# Altium PCB MSP430贴片转直插板.PcbDoc
Units mm, origin at the board's own origin, x right, y up, seen from the top; angles counter-clockwise.
Board outline 152.4 x 101.6 mm, 2 copper layers (Top Layer, Bottom Layer); 5 components, 64 nets, 132 pads, 0 vias.
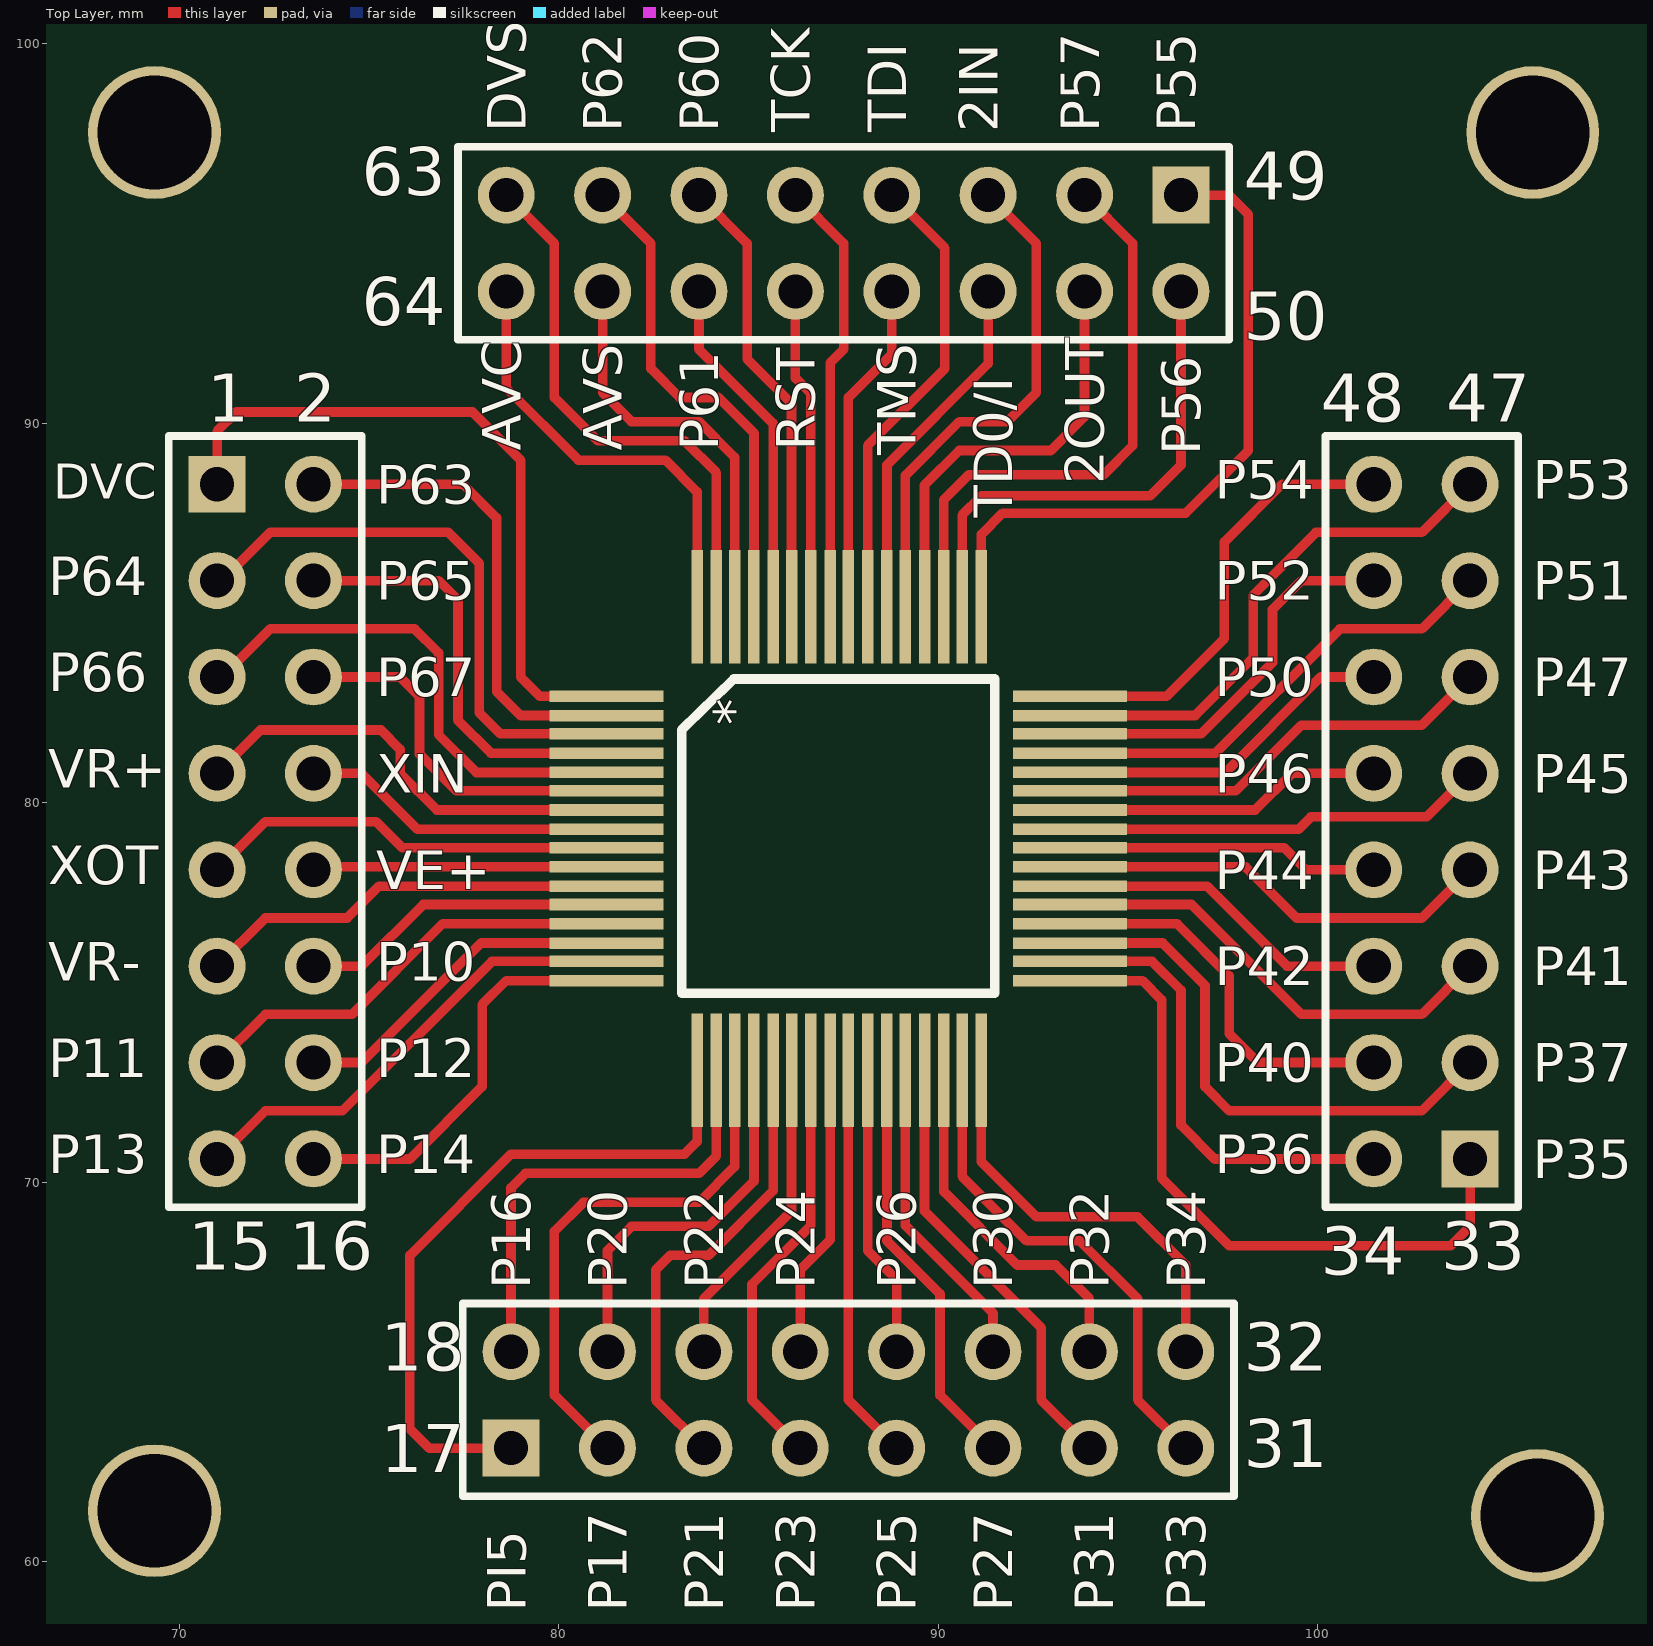
[diagram p0: Top Layer view]
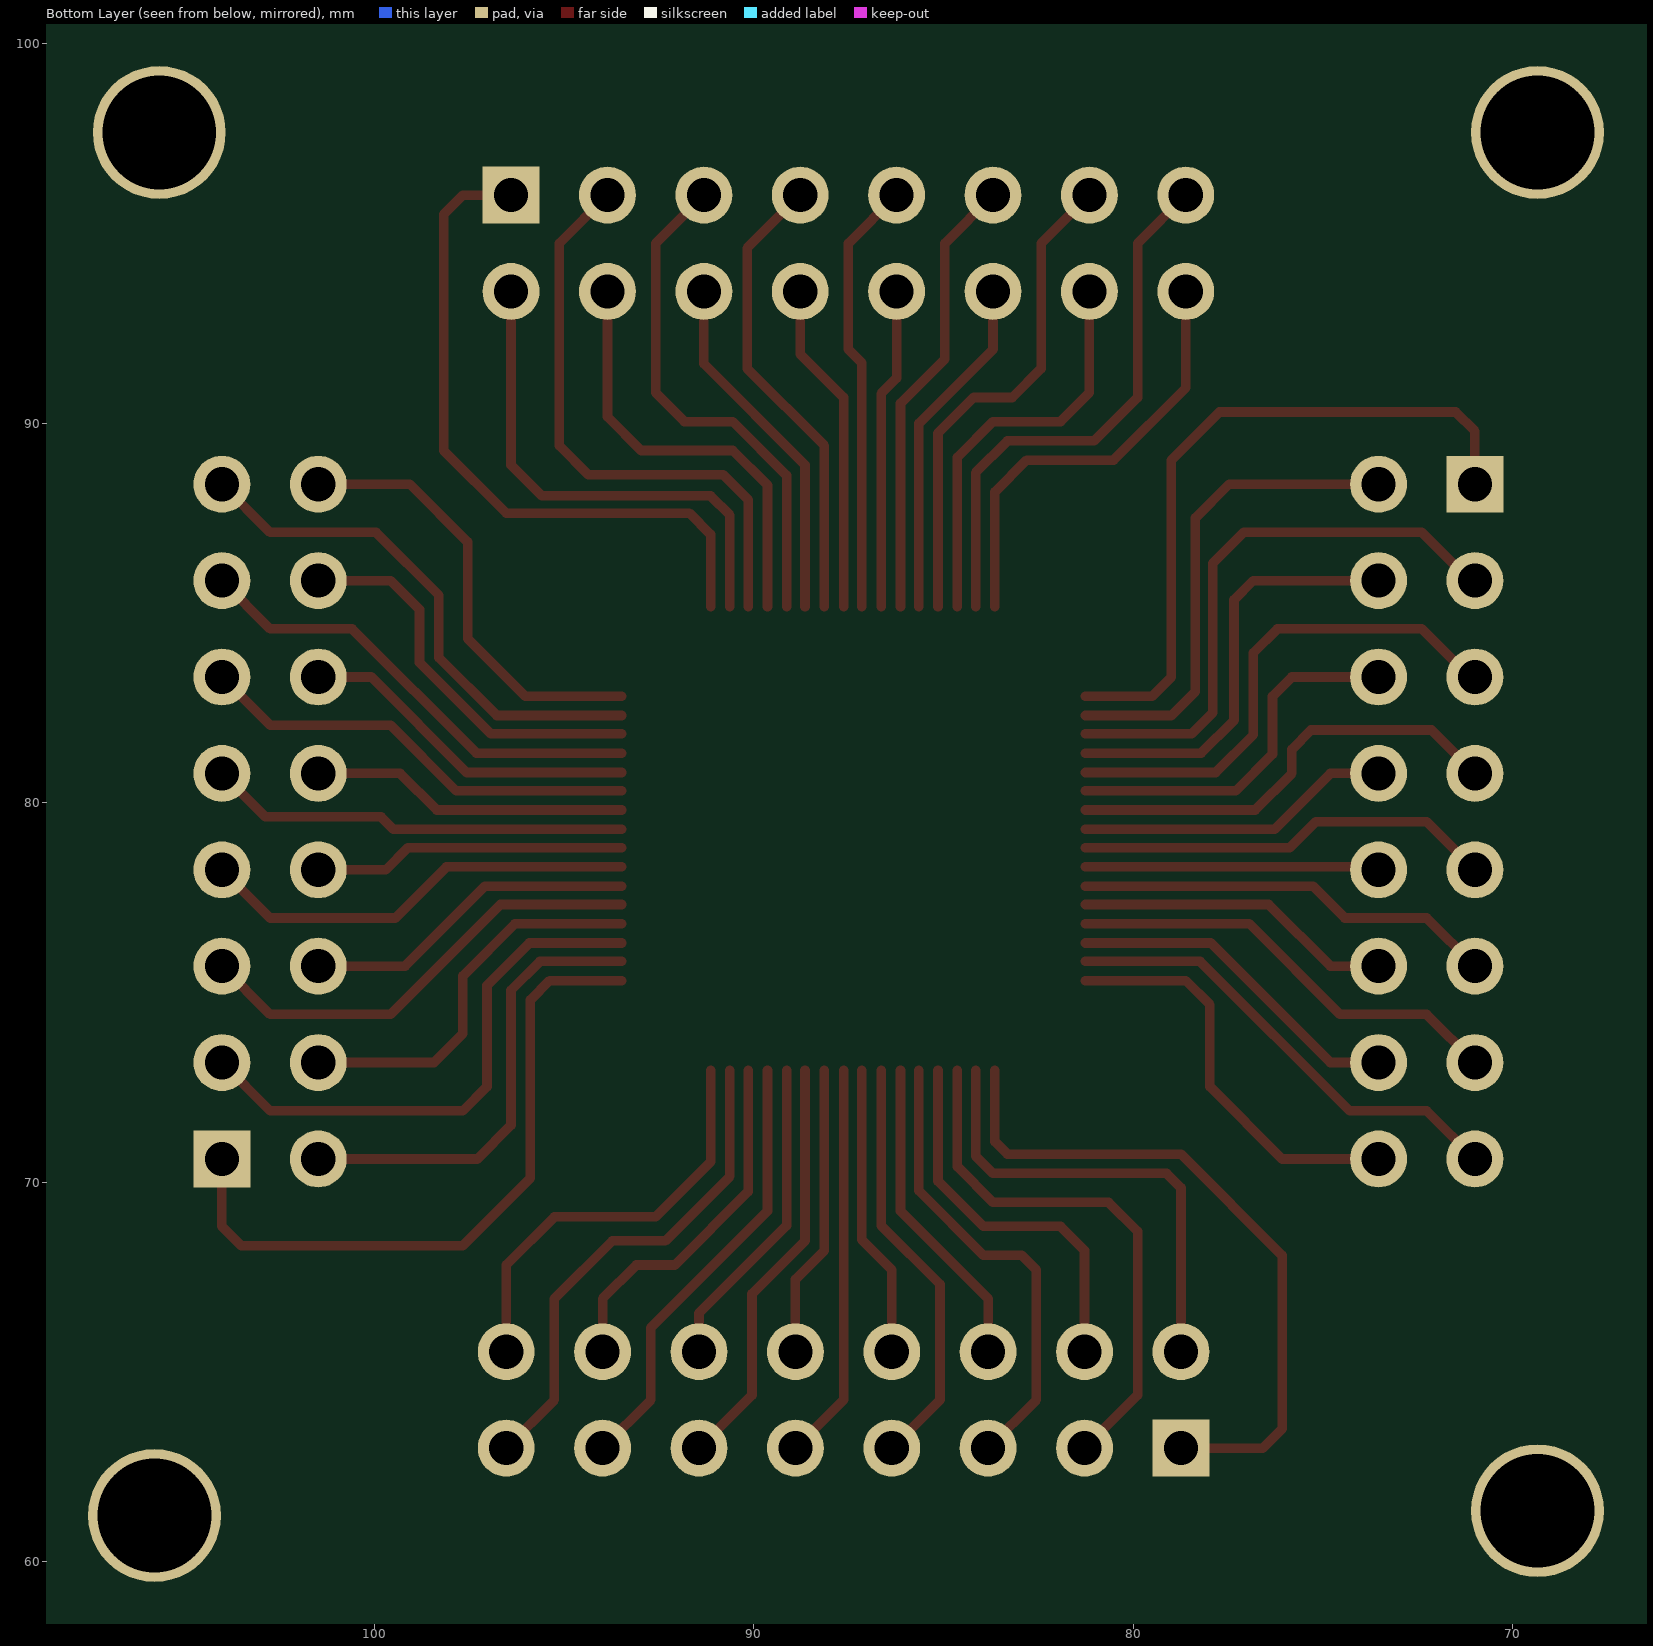
[diagram p1: Bottom Layer view, seen from below]

## Layer stack, top to bottom
Top Layer: signal copper 0.0356
Dielectric: dielectric 0.32, FR-4, Dk 4.8
Bottom Layer: signal copper 0.0356

## Board outline
25.4,25.4 177.8,25.4 177.8,127 25.4,127

## Design rules (kind name [scope] priority, off if disabled: settings)
Clearance [All] p1: gap=0.2
ComponentClearance [All] p1: gap=0.254 collisioncheckmode=3 verticalgap=0.254
PolygonConnect [All] p1: connectstyle=Relief reliefconductorwidth=0.254 reliefentries=4 polygonreliefangle="90 Angle"
RoutingVias [All] p1: holewidth=0.711 width=1.27 viastyle="Through Hole" minholewidth=0.711 minwidth=1.27 maxholewidth=0.711 maxwidth=1.27
SolderMaskExpansion [All] p1: expansion=0.102
TestPointUsage [All] p1: valid=0 allowmultiple=FALSE
Testpoint [All] p1: side=7 testpointundercomponent=TRUE minsize=1.016 maxsize=2.54 preferedsize=1.524 minholesize=0 maxholesize=1.016 preferedholesize=0.813 testpointgrid=0.025 style=1021 order=0123456789
Width [All] p1: maxlimit=0.254 minlimit=0.254 preferedwidth=0.254
17 further rules are at their usual default settings.

## Components (designator, comment, footprint, x,y, rotation, side; value= is the part's Value field where it differs from the comment)
P1 "Header 8X2" HDR2X8 70.993,88.392 r270 top
P2 "Header 8X2" HDR2X8 78.74,62.992 r0 top
P3 "Header 8X2" HDR2X8 104.013,70.612 r90 top
P4 "Header 8X2" HDR2X8 96.393,96.012 r180 top
? "MSP430F149" MSP41X 81.28,82.804 r270 top

## Footprints (in the part's own frame and the unit in brackets; to place one, negate y for a bottom-side part, rotate by r counter-clockwise, add the part's x,y. Pads: shape width x height; smd on the part's side, far side on the other; paste and mask are expansions set on the pad)
HDR2X8 [mm] "Connector; Header; 8x2 Position"
  rect 1.5x1.5 hole 0.9: 1(0,0)
  round 1.5 hole 0.9: 2(0,2.54) 3(2.54,0) 4(2.54,2.54) 5(5.08,0) 6(5.08,2.54) 7(7.62,0) 8(7.62,2.54) 9(10.16,0) 10(10.16,2.54) 11(12.7,0) 12(12.7,2.54) 13(15.24,0) 14(15.24,2.54) 15(17.78,0) 16(17.78,2.54)
  silkscreen extent -1.27,-1.27 19.05,3.81
MSP41X [mil]
  rect 12x118 smd: 1(0,-1) 2(20,-1) 3(39,-1) 4(59,-1) 5(79,-1) 6(98,-1) 7(118,-1) 8(138,-1) 9(157,-1) 10(177,-1) 11(197,-1) 12(216,-1) 13(236,-1) 14(256,-1) 15(275,-1) 16(295,-1) 33(295,480) 34(275,480) 35(256,480) 36(236,480) 37(216,480) 38(197,480) 39(177,480) 40(157,480) 41(138,480) 42(118,480) 43(98,480) 44(79,480) 45(59,480) 46(39,480) 47(20,480) 48(0,480)
  rect 118x12 smd: 17(388,93) 18(388,113) 19(388,132) 20(388,152) 21(388,172) 22(388,191) 23(388,211) 24(388,231) 25(388,250) 26(388,270) 27(388,290) 28(388,309) 29(388,329) 30(388,349) 31(388,368) 32(388,388) 49(-93,388) 50(-93,368) 51(-93,349) 52(-93,329) 53(-93,309) 54(-93,290) 55(-93,270) 56(-93,250) 57(-93,231) 58(-93,211) 59(-93,191) 60(-93,172) 61(-93,152) 62(-93,132) 63(-93,113) 64(-93,93)
  silkscreen extent -18,77 308,402

## Part data
P1 P2 P3 P4: "Header, 8-Pin, Dual row"
?: library part MSP430F133

## Free pads (board coordinates)
  round 3.5 hole 3: 0(69.342,97.663) 1(105.664,97.663) 2(105.791,61.214) 3(69.342,61.341)

## Nets (pads, with @x,y where several pads share a name; then routed paths per layer and width w, separated by ;. In a path a pad name is that pad's centre, name@x,y a point inside that pad or via, vN(x,y) a via of type N, cw(c..) or ccw(c..) an arc to the next point about the centre after c; other vN are vias at no path point)
AVCC: ?.64 P4.16 | length 11.7
  Top Layer w0.254: P4.16 78.613,90.932 80.518,89.027 82.804,89.027 83.642,88.189 ?.64
AVSS: ?.62 P4.14 | length 10.8
  Top Layer w0.254: P4.14 81.153,90.805 81.915,90.043 83.693,90.043 84.633,89.103 ?.62
DVCC: ?.1 P1.1 | length 18.3
  Top Layer w0.254: P1.1 70.993,89.789 71.501,90.297 77.724,90.297 78.994,89.027 78.994,83.312 79.502,82.804 ?.1
DVSS: ?.63 P4.15 | length 14.5
  Top Layer w0.254: P4.15 79.883,94.742 79.883,90.678 81.026,89.535 83.312,89.535 84.15,88.697 ?.63
P10: ?.12 P1.12 | length 8.4
  Top Layer w0.254: P1.12 74.803,75.692 76.429,77.318 ?.12
P11: ?.13 P1.13 | length 11.8
  Top Layer w0.254: P1.13 72.263,74.422 74.549,74.422 76.937,76.81 ?.13
P12: ?.14 P1.14 | length 9
  Top Layer w0.254: P1.14 74.803,73.152 77.953,76.302 ?.14
P13: ?.15 P1.15 | length 12.4
  Top Layer w0.254: P1.15 72.263,71.882 74.295,71.882 78.232,75.819 ?.15
P14: ?.16 P1.16 | length 10.9
  Top Layer w0.254: P1.16 76.073,70.612 77.978,72.517 77.978,74.676 78.613,75.311 ?.16
P16: ?.18 P2.2 | length 12.3
  Top Layer w0.254: P2.2 78.74,69.85 79.121,70.231 83.693,70.231 84.15,70.688 ?.18
P17: ?.19 P2.3 | length 14.3
  Top Layer w0.254: P2.3 79.883,64.389 79.883,68.707 80.645,69.469 83.693,69.469 84.633,70.409 ?.19
P18: ?.20 P2.4 | length 10.2
  Top Layer w0.254: P2.4 81.28,68.199 81.915,68.834 83.947,68.834 85.141,70.028 ?.20
P21: ?.21 P2.5 | length 12.4
  Top Layer w0.254: P2.5 82.55,64.262 82.55,67.691 82.931,68.072 83.947,68.072 85.649,69.774 ?.21
P22: ?.22 P2.6 | length 8.4
  Top Layer w0.254: P2.6 83.82,66.929 86.131,69.24 ?.22
P23: ?.23 P2.7 | length 11.1
  Top Layer w0.254: P2.7 85.09,64.262 85.09,67.31 86.639,68.859 ?.23
P24: ?.24 P2.8 | length 7.7
  Top Layer w0.254: P2.8 86.36,67.691 87.147,68.478 ?.24
P25: ?.25 P2.9 | length 10.5
  Top Layer w0.254: ?.25 87.63,64.262 P2.9
P26: ?.26 P2.10 | length 7.7
  Top Layer w0.254: ?.26 88.138,68.199 88.9,67.437 P2.10
P27: ?.27 P2.11 | length 11.1
  Top Layer w0.254: ?.27 88.646,68.453 90.043,67.056 90.043,64.389 P2.11
P30: ?.28 P2.12 | length 8.4
  Top Layer w0.254: ?.28 89.129,68.859 91.44,66.548 P2.12
P31: ?.29 P2.13 | length 11.8
  Top Layer w0.254: ?.29 89.637,69.24 92.71,66.167 92.71,64.262 P2.13
P32: ?.30 P2.14 | length 9.6
  Top Layer w0.254: ?.30 90.145,69.748 92.075,67.818 93.091,67.818 93.98,66.929 P2.14
P33: ?.31 P2.15 | length 13.2
  Top Layer w0.254: ?.31 90.627,70.155 92.329,68.453 93.726,68.453 95.25,66.929 95.25,64.262 P2.15
P34: ?.32 P2.16 | length 11.2
  Top Layer w0.254: ?.32 91.135,70.536 92.583,69.088 95.25,69.088 96.52,67.818 P2.16
P35: ?.33 P3.1 | length 18.2
  Top Layer w0.254: ?.33 95.377,75.311 95.885,74.803 95.885,70.104 97.663,68.326 103.505,68.326 104.013,68.834 P3.1
P36: ?.34 P3.2 | length 12.2
  Top Layer w0.254: ?.34 95.631,75.819 96.393,75.057 96.393,71.501 97.282,70.612 P3.2
P37: ?.35 P3.3 | length 14.5
  Top Layer w0.254: ?.35 95.91,76.302 97.028,75.184 97.028,72.517 97.663,71.882 102.743,71.882 P3.3
P40: ?.36 P3.4 | length 10.4
  Top Layer w0.254: ?.36 96.291,76.81 97.663,75.438 97.663,73.914 98.425,73.152 P3.4
P41: ?.37 P3.5 | length 12.3
  Top Layer w0.254: ?.37 96.672,77.318 99.568,74.422 102.743,74.422 P3.5
P42: ?.38 P3.6 | length 8.9
  Top Layer w0.254: ?.38 97.079,77.8 99.187,75.692 P3.6
P43: ?.39 P3.7 | length 11.6
  Top Layer w0.254: ?.39 98.095,78.308 99.441,76.962 102.743,76.962 P3.7
P44: ?.40 P3.8 | length 8.2
  Top Layer w0.254: ?.40 99.111,78.816 99.695,78.232 P3.8
P45: ?.41 P3.9 | length 11.2
  Top Layer w0.254: ?.41 99.492,79.299 99.822,79.629 102.87,79.629 P3.9
P46: ?.42 P3.10 | length 8.4
  Top Layer w0.254: ?.42 98.349,79.807 99.314,80.772 P3.10
P47: ?.43 P3.11 | length 11.8
  Top Layer w0.254: ?.43 97.841,80.315 99.568,82.042 102.743,82.042 P3.11
P50: ?.44 P3.12 | length 9
  Top Layer w0.254: ?.44 97.561,80.797 100.076,83.312 P3.12
P51: ?.45 P3.13 | length 12.4
  Top Layer w0.254: ?.45 97.307,81.305 100.584,84.582 102.743,84.582 P3.13
P52: ?.46 P3.14 | length 10.5
  Top Layer w0.254: ?.46 96.926,81.813 98.806,83.693 98.806,85.09 99.568,85.852 P3.14
P53: ?.47 P3.15 | length 14
  Top Layer w0.254: ?.47 96.767,82.296 98.298,83.827 98.298,85.471 99.949,87.122 102.743,87.122 P3.15
P54: ?.48 P3.16 | length 11.8
  Top Layer w0.254: ?.48 96.012,82.804 97.536,84.328 97.536,86.868 99.06,88.392 P3.16
P55: ?.49 P4.1 | length 18.1
  Top Layer w0.254: ?.49 91.135,87.071 91.694,87.63 96.52,87.63 98.171,89.281 98.171,95.504 97.663,96.012 P4.1
P56: ?.50 P4.2 | length 13.3
  Top Layer w0.254: ?.50 90.627,87.579 91.132,88.084 95.577,88.084 96.393,88.9 P4.2
P57: ?.51 P4.3 | length 15.5
  Top Layer w0.254: ?.51 90.145,87.986 90.805,88.646 94.361,88.646 95.123,89.408 95.123,94.742 P4.3
P60: ?.59 P4.11 | length 11.9
  Top Layer w0.254: P4.11 84.963,94.742 84.963,91.694 86.131,90.526 ?.59
P61: ?.60 P4.12 | length 9.1
  Top Layer w0.254: P4.12 83.693,91.948 85.649,89.992 ?.60
P62: ?.61 P4.13 | length 13.1
  Top Layer w0.254: P4.13 82.423,94.742 82.423,91.44 83.185,90.678 84.201,90.678 85.141,89.738 ?.61
P63: ?.2 P1.2 | length 12.9
  Top Layer w0.254: P1.2 77.47,88.392 78.359,87.503 78.359,82.931 78.994,82.296 ?.2
P64: ?.3 P1.3 | length 15.3
  Top Layer w0.254: P1.3 71.12,85.852 72.39,87.122 77.089,87.122 77.905,86.306 77.905,82.369 78.461,81.813 ?.3
P65: ?.4 P1.4 | length 11.5
  Top Layer w0.254: P1.4 76.835,85.852 77.343,85.344 77.343,82.169 78.207,81.305 ?.4
P66: ?.5 P1.5 | length 13.6
  Top Layer w0.254: P1.5 71.12,83.312 72.39,84.582 76.2,84.582 76.835,83.947 76.835,81.788 77.826,80.797 ?.5
P67: ?.6 P1.6 | length 9.9
  Top Layer w0.254: P1.6 75.819,83.312 76.327,82.804 76.327,81.28 77.292,80.315 ?.6
PIST: ?.17 P2.1 | length 18.1
  Top Layer w0.254: P2.1 76.581,62.992 76.073,63.5 76.073,68.072 78.74,70.739 83.312,70.739 83.642,71.069 ?.17
RST/NM: ?.58 P4.10 | length 8.5
  Top Layer w0.254: P4.10 86.233,91.186 86.639,90.78 ?.58
TCK: ?.57 P4.9 | length 11.5
  Top Layer w0.254: P4.9 87.503,94.742 87.503,91.948 87.147,91.592 ?.57
TDI: ?.55 P4.7 | length 12.3
  Top Layer w0.254: ?.55 88.138,89.408 90.17,91.44 90.17,94.615 P4.7
TDO/I: ?.54 P4.6 | length 9.4
  Top Layer w0.254: ?.54 88.646,88.9 91.313,91.567 P4.6
TMS: ?.56 P4.8 | length 8.8
  Top Layer w0.254: ?.56 87.63,90.678 88.773,91.821 P4.8
VEREF+: ?.10 P1.10 | length 7.8
  Top Layer w0.254: P1.10 73.609,78.308 ?.10
VREF+: ?.7 P1.7 | length 12
  Top Layer w0.254: P1.7 72.136,81.915 75.311,81.915 75.819,81.407 75.819,80.772 76.784,79.807 ?.7
VREF-: ?.11 P1.11 | length 11.1
  Top Layer w0.254: P1.11 72.263,76.962 74.422,76.962 75.26,77.8 ?.11
XIN: ?.8 P1.8 | length 8.3
  Top Layer w0.254: P1.8 74.803,80.772 76.276,79.299 ?.8
XOUT: ?.9 P1.9 | length 11.1
  Top Layer w0.254: P1.9 72.263,79.502 75.184,79.502 75.87,78.816 ?.9
XT2IN: ?.53 P4.5 | length 13.5
  Top Layer w0.254: ?.53 89.129,88.621 90.551,90.043 91.821,90.043 92.583,90.805 92.583,94.742 P4.5
XT2OUT: ?.52 P4.4 | length 11.5
  Top Layer w0.254: ?.52 89.637,88.367 90.551,89.281 92.964,89.281 93.853,90.17 P4.4

## Silkscreen, mask and mechanical layers (free items; w line width, h text height)
Top Overlay:
  text "DVS" at 79.121,97.663 h1.02 r90
  text "P62" at 81.661,97.663 h1.02 r90
  text "P60" at 84.201,97.663 h1.02 r90
  text "TCK" at 86.614,97.663 h1.02 r90
  text "TDI" at 89.154,97.663 h1.02 r90
  text "2IN" at 91.567,97.663 h1.02 r90
  text "P57" at 94.234,97.663 h1.02 r90
  text "P55" at 96.774,97.663 h1.02 r90
  text "AVC" at 78.994,89.281 h1.02 r90
  text "AVS" at 81.661,89.281 h1.02 r90
  text "P61" at 84.201,89.281 h1.02 r90
  text "RST" at 86.741,89.281 h1.02 r90
  text "TMS" at 89.408,89.154 h1.02 r90
  text "P56" at 96.901,89.154 h1.02 r90
  text "2OUT" at 94.361,88.392 h1.02 r90
  text "DVC" at 66.675,88.011 h0.92
  text "P54" at 97.282,88.011 h1.02
  text "P53" at 105.664,88.011 h1.02
  text "P63" at 75.184,87.884 h1.02
  text "TD0/I" at 91.948,87.503 h1.02 r90
  text "P64" at 66.548,85.471 h1.02
  text "P65" at 75.184,85.344 h1.02
  text "P52" at 97.282,85.344 h1.02
  text "P51" at 105.664,85.344 h1.02
  text "P66" at 66.548,82.931 h1.02
  text "P67" at 75.184,82.804 h1.02
  text "P50" at 97.282,82.804 h1.02
  text "P47" at 105.664,82.804 h1.02
  text "*" at 85.09,82.042 h1.02 r90
  text "VR+" at 66.548,80.391 h1.02
  text "XIN" at 75.184,80.264 h1.02
  text "P46" at 97.282,80.264 h1.02
  text "P45" at 105.664,80.264 h1.02
  text "XOT" at 66.548,77.851 h1.02
  text "VE+" at 75.184,77.724 h1.02
  text "P44" at 97.282,77.724 h1.02
  text "P43" at 105.664,77.724 h1.02
  text "VR-" at 66.548,75.311 h1.02
  text "P10" at 75.184,75.311 h1.02
  text "P42" at 97.282,75.184 h1.02
  text "P41" at 105.664,75.184 h1.02
  text "P11" at 66.548,72.771 h1.02
  text "P12" at 75.184,72.771 h1.02
  text "P40" at 97.282,72.644 h1.02
  text "P37" at 105.664,72.644 h1.02
  text "P13" at 66.548,70.231 h1.02
  text "P14" at 75.184,70.231 h1.02
  text "P36" at 97.282,70.231 h1.02
  text "P35" at 105.664,70.104 h1.02
  text "P16" at 79.248,67.183 h1.02 r90
  text "P20" at 81.788,67.183 h1.02 r90
  text "P22" at 84.328,67.183 h1.02 r90
  text "P24" at 86.741,67.183 h1.02 r90
  text "P26" at 89.408,67.183 h1.02 r90
  text "P30" at 91.948,67.183 h1.02 r90
  text "P32" at 94.488,67.183 h1.02 r90
  text "P34" at 97.028,67.183 h1.02 r90
  text "PI5" at 79.121,58.674 h1.02 r90
  text "P17" at 81.788,58.674 h1.02 r90
  text "P21" at 84.328,58.674 h1.02 r90
  text "P23" at 86.741,58.674 h1.02 r90
  text "P25" at 89.408,58.674 h1.02 r90
  text "P27" at 91.948,58.674 h1.02 r90
  text "P31" at 94.615,58.674 h1.02 r90
  text "P33" at 97.028,58.674 h1.02 r90
Mechanical 1:
  lines w0.254: 65.913,59.309 65.913,99.822 67.183,101.092 107.823,101.092 109.093,99.822 109.093,59.182 107.823,57.912 67.31,57.912 65.913,59.309

## Text inside footprints (layer, text, board x,y; h text height)
P1: Top Overlay "2" at 73.025,90.043 h1.27; Top Overlay "1" at 70.739,90.043 h1.27; Top Overlay "15" at 70.231,67.691 h1.27; Top Overlay "16" at 72.898,67.691 h1.27
P2: Top Overlay "18" at 75.311,65.024 h1.27; Top Overlay "17" at 75.311,62.357 h1.27; Top Overlay "31" at 98.044,62.484 h1.27; Top Overlay "32" at 98.044,65.024 h1.27
P3: Top Overlay "34" at 100.076,67.564 h1.27; Top Overlay "33" at 103.251,67.691 h1.27; Top Overlay "47" at 103.378,90.043 h1.27; Top Overlay "48" at 100.076,90.043 h1.27
P4: Top Overlay "50" at 98.044,92.202 h1.27; Top Overlay "49" at 98.044,95.885 h1.27; Top Overlay "63" at 74.803,96.012 h1.27; Top Overlay "64" at 74.803,92.583 h1.27